# Altium PCB PCB2.PcbDoc
Units mil, origin at the board's own origin, x right, y up, seen from the top; angles counter-clockwise.
Board outline 2175 x 1405 mil, 2 copper layers (Top Layer, Bottom Layer); 9 components, 12 nets, 78 pads, 11 vias.
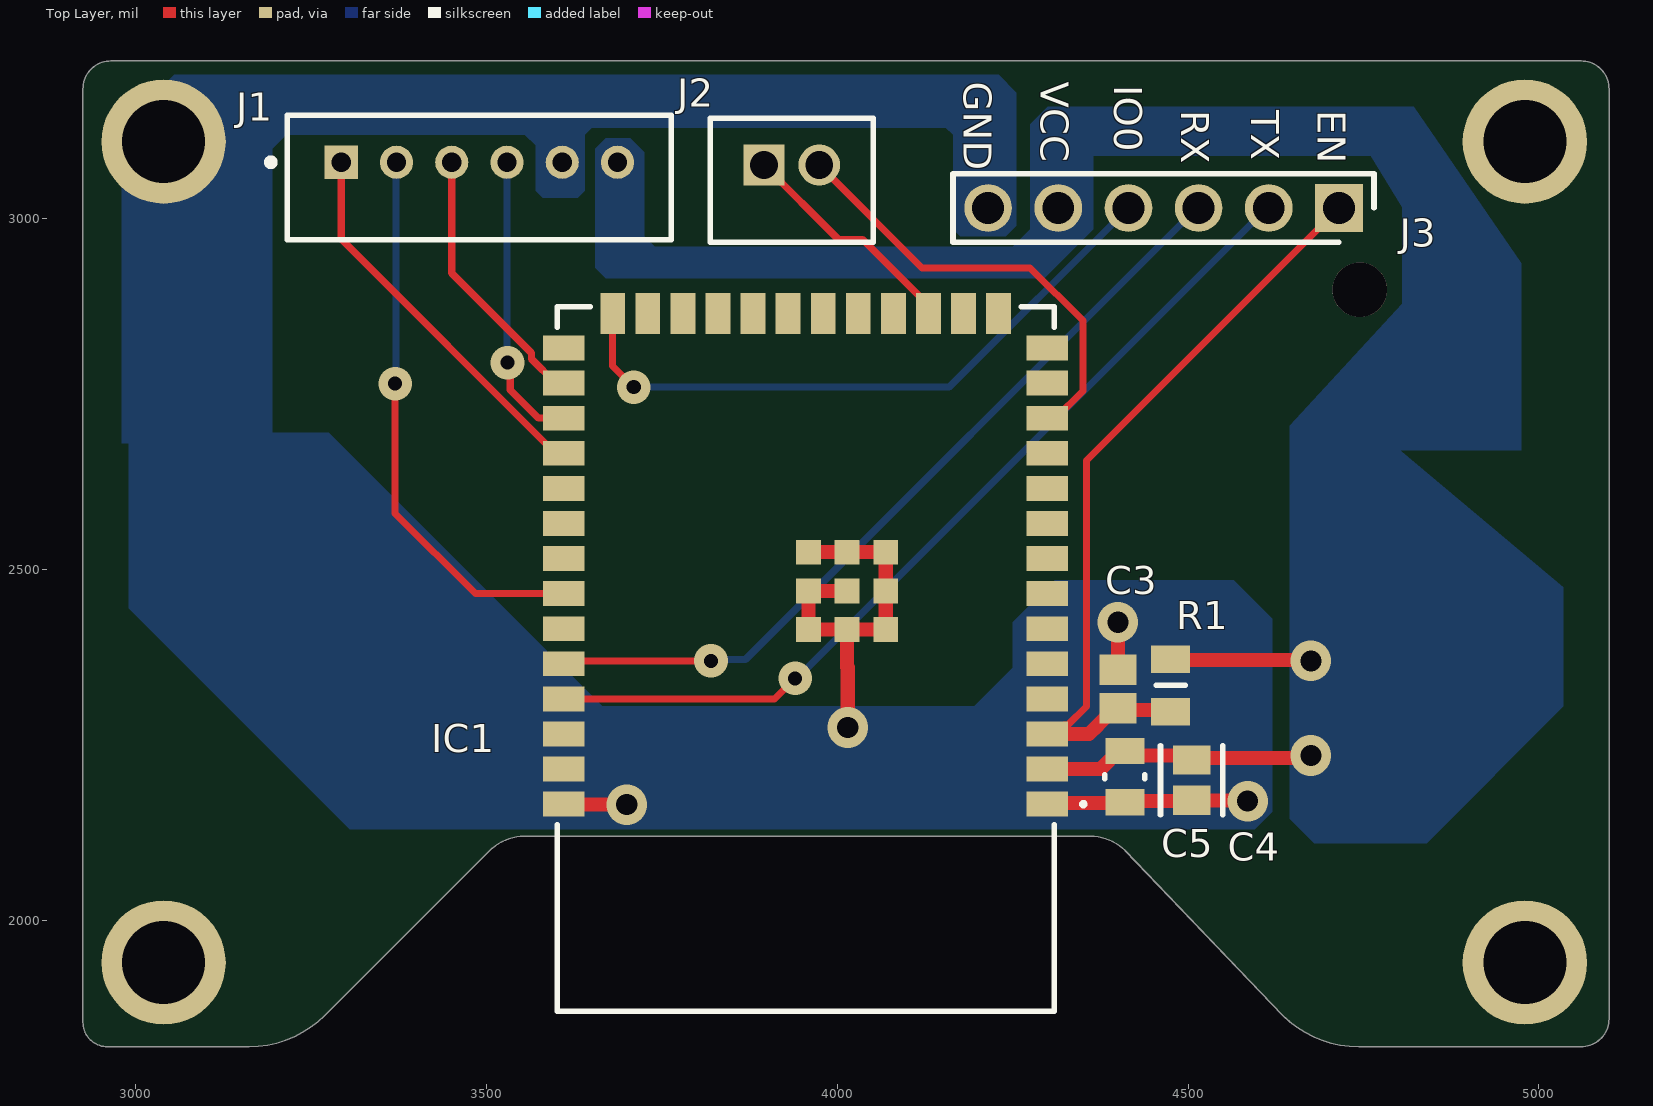
[diagram p0: Top Layer view]
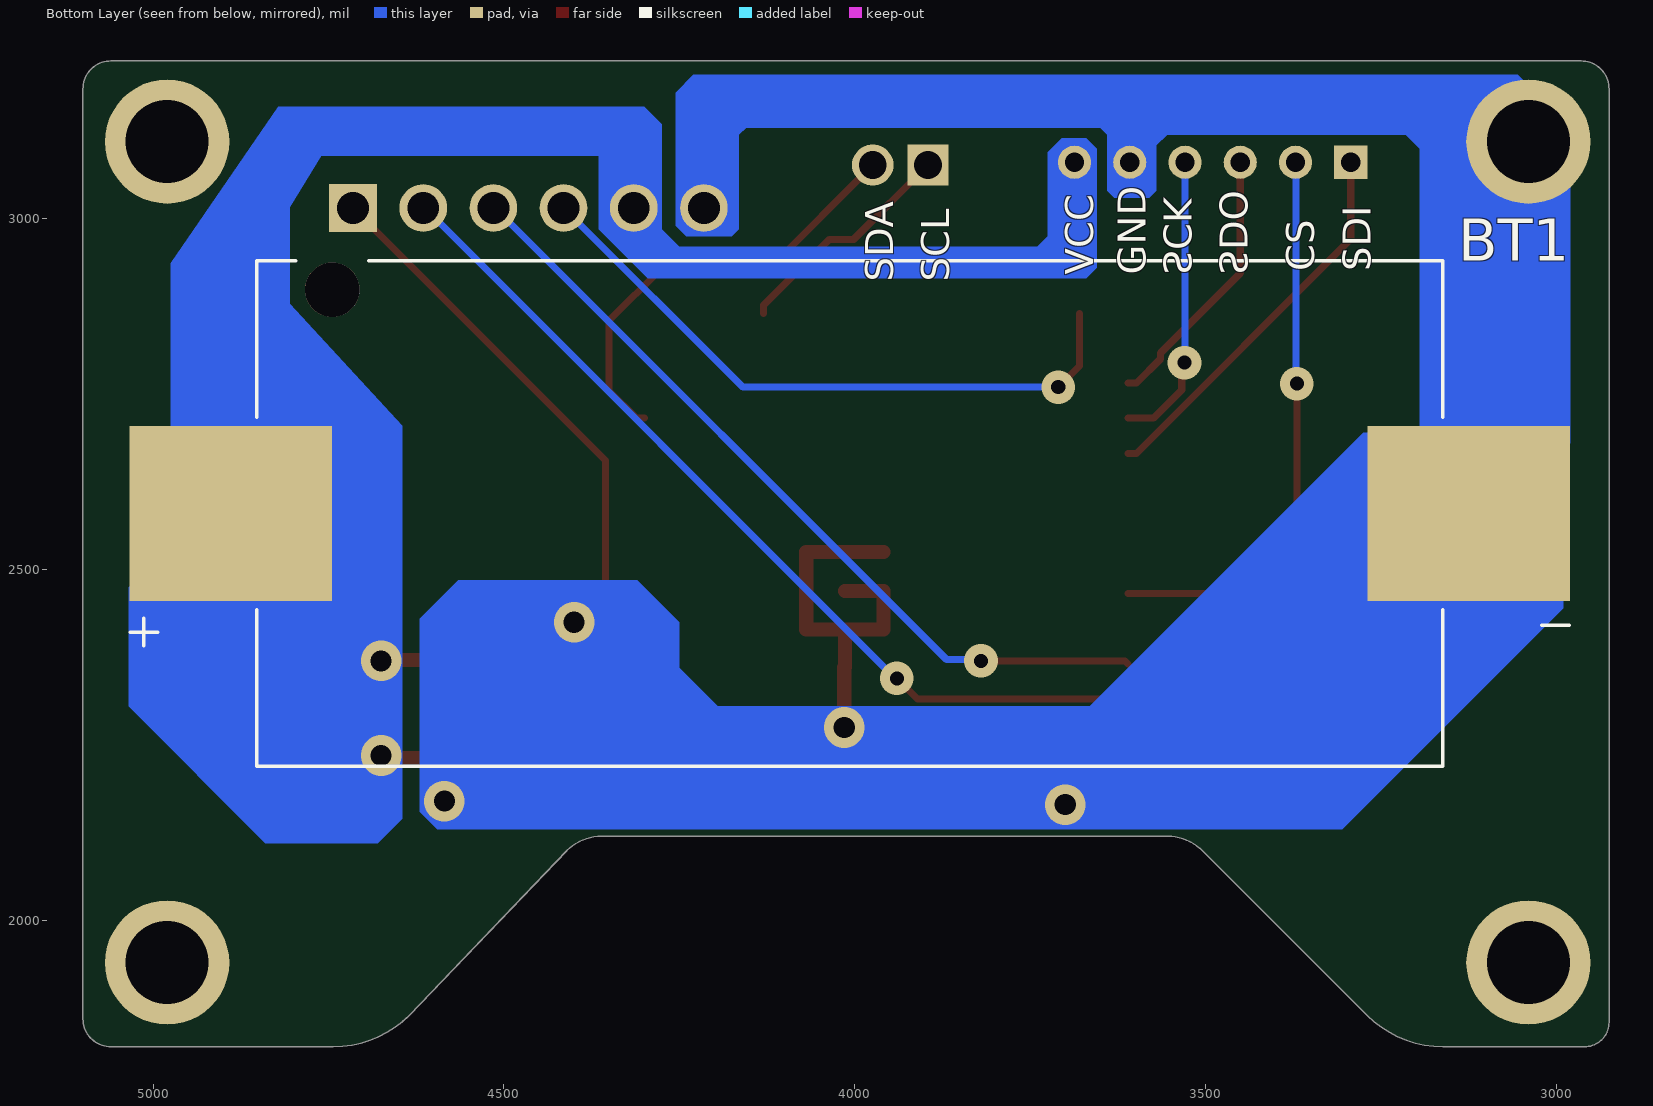
[diagram p1: Bottom Layer view, seen from below]
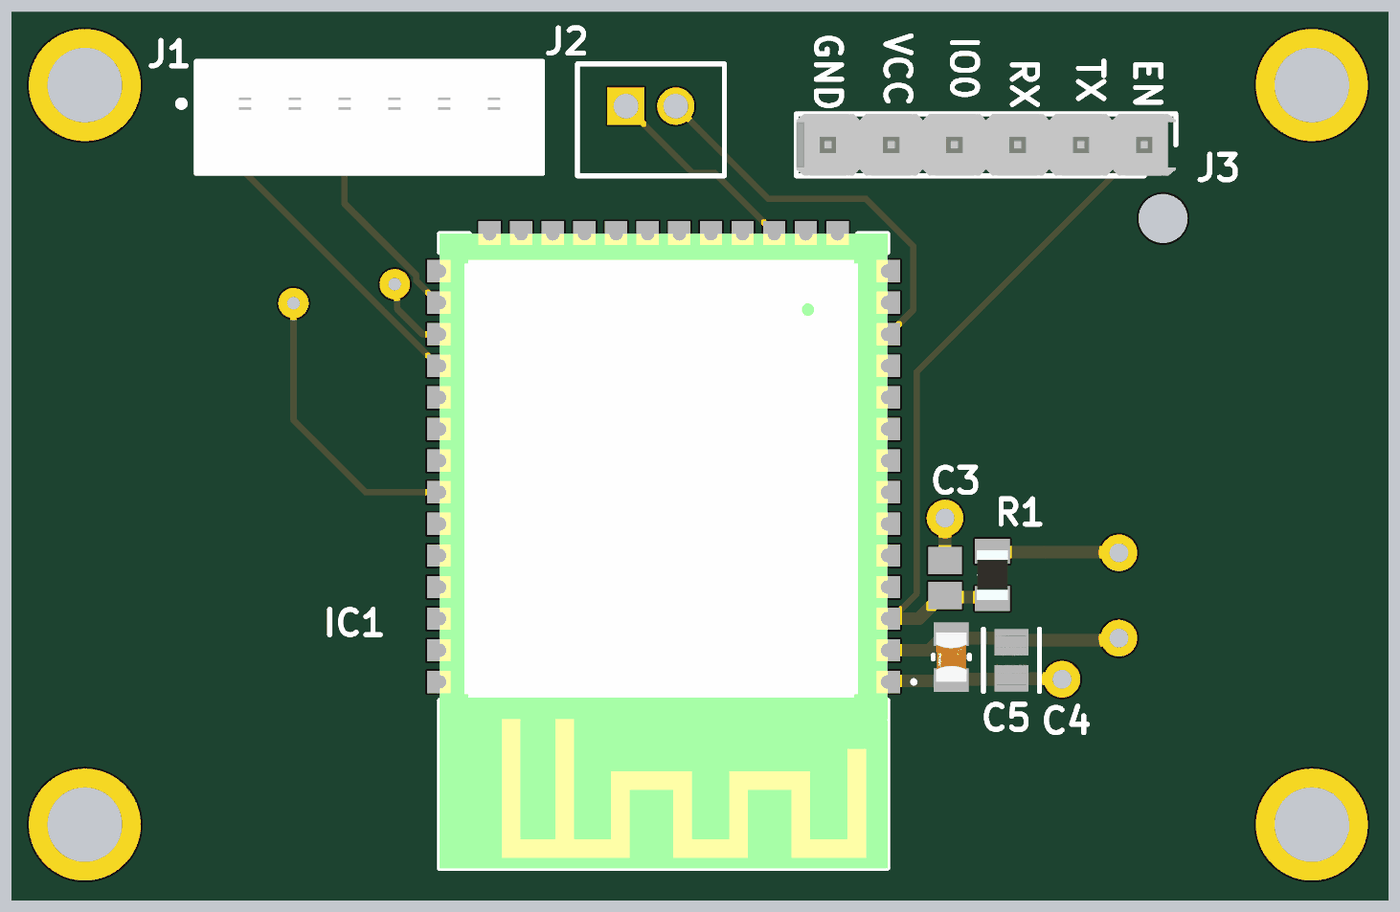
[diagram p2: 3D render of the assembled board from above, using the file's embedded part models]

## Layer stack, top to bottom
Top Solder: solder mask 0.4, Solder Resist, Dk 3.5
Top Layer: signal copper 1.4
Dielectric 1: dielectric 12.6, FR-4, Dk 4.8
Bottom Layer: signal copper 1.4
Bottom Solder: solder mask 0.4, Solder Resist, Dk 3.5

## Board outline
3269.75,1864.75 3504.39,2099.39 cw(c3554.14,2049.65) 3554.14,2120 4360.86,2120 cw(c4360.86,2049.67) 4410.61,2099.39 4635,1864.75 ccw(c4743.03,1972.78) 4743.03,1820 5060,1820 ccw(c5060,1860) 5100,1860 5100,3185 ccw(c5060,3185) 5060,3225 2965,3225 ccw(c2965,3185) 2925,3185 2925,1855 ccw(c2960,1855) 2960,1820 3161.72,1820 ccw(c3161.72,1972.78)

## Design rules (kind name [scope] priority, off if disabled: settings)
BoardOutlineClearance [All] p1: gap=7.87 ignorepadtopadclearanceinfootprint=FALSE
Clearance [All] p1: gap=5 ignorepadtopadclearanceinfootprint=FALSE except(9.84: Arc-Hole Track-Hole SMDPad-Hole THPad-Hole Via-Hole Fill-Hole Poly-Hole Region-Hole Text-Hole)
ComponentClearance [All] p1: gap=5 collisioncheckmode=3 verticalgap=5 showdistances=TRUE
DiffPairsRouting [All] p1: maxlimit=10 minlimit=5 mostfreqgap=5 toplayer_minwidth=5 toplayer_maxwidth=1000 toplayer_prefwidth=5 bottomlayer_minwidth=5 bottomlayer_maxwidth=1000 bottomlayer_prefwidth=5 maxuncoupledlength=500
Height [All] p1: minheight=0 maxheight=71497.94 prefheight=500
HoleSize [All] p1: absolutevalues=TRUE maxlimit=248.03 minlimit=11.81 maxpercent=80.000 minpercent=20.000
HoleToHoleClearance [All] p1: gap=9.84 allowstackedmicrovias=FALSE
MinimumAnnularRing [All] p1: minimumring=3
MinimumSolderMaskSliver [All] p1: minsoldermaskwidth=0
PlaneClearance [All] p1: clearance=5
PlaneConnect PlaneConnectPowerPads [InPadClass('PowerPads')] p1: planeconnectstyle=Direct reliefexpansion=20 reliefentries=4 reliefconductorwidth=10 reliefairgap=10
PlaneConnect [All] p2: pad.planeconnectstyle=Relief pad.reliefexpansion=11.81 pad.reliefentries=4 pad.reliefconductorwidth=5 pad.reliefairgap=5 via.planeconnectstyle=Direct via.reliefexpansion=11.81 via.reliefentries=4 via.reliefconductorwidth=5 via.reliefairgap=5
PolygonConnect PolygonConnectPowerPads [All vs (InPadClass('PowerPads'))] p1: connectstyle=Direct reliefconductorwidth=10 reliefentries=4 polygonreliefangle="90 Angle" airgapwidth=10
PolygonConnect [All] p2: thpad.connectstyle=Relief thpad.reliefconductorwidth=5 thpad.reliefentries=4 thpad.polygonreliefangle="90 Angle" thpad.airgapwidth=5 smdpad.connectstyle=Relief smdpad.reliefconductorwidth=5 smdpad.reliefentries=4 smdpad.polygonreliefangle="90 Angle" smdpad.airgapwidth=5 via.connectstyle=Direct via.reliefconductorwidth=5 via.reliefentries=4 via.polygonreliefangle="90 Angle" via.airgapwidth=5
RoutingVias [All] p1: holewidth=11.81 width=23.62 viastyle="Through Hole" minholewidth=11.81 minwidth=23.62 maxholewidth=23.62 maxwidth=259.84
SilkToSilkClearance [All] p1: silktosilkclearance=0
SilkToSolderMaskClearance [IsPad] p1: minsilkscreentomaskgap=5 clearancetoexposedcopper=TRUE
SolderMaskExpansion [All] p1: expansion=2.95 istentingtop=FALSE
Width [All] p1: maxlimit=1000 minlimit=5 preferedwidth=5 minimp=50.000000 maximp=50.000000 favimp=50.000000
20 further rules are at their usual default settings.

## Components (designator, comment, footprint, x,y, rotation, side; value= is the part's Value field where it differs from the comment)
BT1 "1128" BAT_1128 4007.09,2580 r180 bottom
C3 "1uF" CAPC2013X140X50LL20T25 4400,2330 r270 top
C4 "22uF" FP-CL21-IPC_C 4505,2200 r270 top
C5 "CC0805KRX7R7BB104" FP-CC0805-0_85-MFG 4410,2205 r270 top value="100 nF"
IC1 "ESP32-S3-WROOM-1" ESP32S3WROOM1 3955,2372.87 r180 top
J1 "B6B-PH-K-K(LF)(SN)" FP-B6B-PH-K-K_LF_SN-MFG 3490,3058.94 r180 top
J2 "B2B-PH-K-S(LF)(SN)" JST-B2B-PH-K-S_V 3935,3055 r0 top
J3 "22-28-4060" HDRV6W66P0X254_1X6_1524X249X838P 4715,3015.43 r180 top
R1 "10K" RESC2012X60N 4475,2335 r270 top

## Footprints (in the part's own frame and the unit in brackets; to place one, negate y for a bottom-side part, rotate by r counter-clockwise, add the part's x,y. Pads: shape width x height; smd on the part's side, far side on the other; paste and mask are expansions set on the pad)
BAT_1128 [mm]
  rect 7.34x6.35 smd: N(22.405,0) P(-22.405,0)
  round 1.98 hole 1.98 unplated: ""(-18.735,8.1)
  silkscreen extent -26.05,-9.15 26.05,9.15
CAPC2013X140X50LL20T25 [mm] "Chip Capacitor, 2-Leads, Body 2.00x1.25mm, IPC High Density"
  rect 1.1x1.35 smd: 1(-0.7,0) 2(0.7,0)
  body extent -1.1,-0.72 1.1,0.72, height 1.4
ESP32S3WROOM1 [mm]
  rect 1.5x0.9 smd: 1(-8.75,5.26) 2(-8.75,3.99) 3(-8.75,2.72) 4(-8.75,1.45) 5(-8.75,0.18) 6(-8.75,-1.09) 7(-8.75,-2.36) 8(-8.75,-3.63) 9(-8.75,-4.9) 10(-8.75,-6.17) 11(-8.75,-7.44) 12(-8.75,-8.71) 13(-8.75,-9.98) 14(-8.75,-11.25) 27(8.75,-11.25) 28(8.75,-9.98) 29(8.75,-8.71) 30(8.75,-7.44) 31(8.75,-6.17) 32(8.75,-4.9) 33(8.75,-3.63) 34(8.75,-2.36) 35(8.75,-1.09) 36(8.75,0.18) 37(8.75,1.45) 38(8.75,2.72) 39(8.75,3.99) 40(8.75,5.26)
  rect 0.9x1.5 smd: 15(-6.985,-12.5) 16(-5.715,-12.5) 17(-4.445,-12.5) 18(-3.175,-12.5) 19(-1.905,-12.5) 20(-0.635,-12.5) 21(0.635,-12.5) 22(1.905,-12.5) 23(3.175,-12.5) 24(4.445,-12.5) 25(5.715,-12.5) 26(6.985,-12.5)
  rect 0.9x0.9 smd: 41(-1.5,-2.46) 42(-1.5,-1.06) 43(-2.9,-1.06) 44(-2.9,-2.46) 45(-2.9,-3.86) 46(-1.5,-3.86) 47(-0.1,-3.86) 48(-0.1,-2.46) 49(-0.1,-1.06)
  silkscreen extent -10.1,-12.75 9,12.75, body extent -9,-12.75 9,12.75, height 3.1
FP-B6B-PH-K-K_LF_SN-MFG [mm]
  rect 1.2x1.2 hole 0.7 paste-1000 mask+0: 1(5,-0.55)
  round 1.2 hole 0.7 paste-1000 mask+0: 2(3,-0.55) 3(1,-0.55) 4(-1,-0.55) 5(-3,-0.55) 6(-5,-0.55)
  silkscreen extent -6.95,-2.25 7.67,2.25, body extent -7.05,-2.35 7.05,2.35, height 0.25
FP-CC0805-0_85-MFG [mm]
  rect 0.95x1.4 smd paste+0 mask+0: 1(-0.925,0) 2(0.925,0)
  silkscreen extent -0.08,-0.72 0.08,0.72, body extent -1.6,-1.05 1.6,1.05, height 0.25
FP-CL21-IPC_C [mil]
  rect 41.52x53.39 smd paste+0 mask+0: 1(-28.57,0) 2(28.57,0)
  silkscreen extent -49,-44 49,44, body extent -53,-32 53,32, height 10
HDRV6W66P0X254_1X6_1524X249X838P [mm]
  rect 1.725x1.725 hole 1.15: 1(0,0)
  round 1.725 hole 1.15: 2(2.54,0) 3(5.08,0) 4(7.62,0) 5(10.16,0) 6(12.7,0)
  silkscreen extent -1.27,-1.24 13.97,1.24, body extent -1.27,-1.24 13.97,1.24, height 8.38
JST-B2B-PH-K-S_V [mm] "Connector, 2-Leads, Body 5.9x4.5mm, Pitch 2mm"
  rect 1.5x1.5 hole 1: 1(-1,0.55)
  round 1.5 hole 1: 2(1,0.55)
  silkscreen extent -2.95,-2.25 2.95,2.25, body extent -2.95,-2.25 2.95,2.25, height 6
RESC2012X60N [mm]
  rect 1x1.4 smd: 1(-0.95,0) 2(0.95,0)
  silkscreen extent 0,-0.53 0,0.53, body extent -1,-0.63 1,0.63, height 0.6

## Part data
BT1: "SMT Holder for CR123A Battery w/ coil spring", Package=None, Availability="In Stock", Check_prices=https://www.snapeda.com/parts/1128/Keystone+Electronics/view-part/?ref=eda, MF="Keystone Electronics", MP=1128, Price=None, Purchase-URL=https://pricing.snapeda.com/search/part/1128/?ref=eda, SnapEDA_Link=https://www.snapeda.com/parts/1128/Keystone+Electronics/view-part/?ref=snap
C3: library part CMP-2007-04674-1, Manufacturer="AVX Interconnect / Elco", Part Number=0805ZC105KAZ2A
C4: library part CMP-13271-002990-1, "CL21 Series 0805 22uF 16V ±20% Tolerance X5R Multilayer Ceramic Chip Capacitor", Case Code (Imperial)=0805, Case Code (Metric)=2012, Max Operating Temperature=85°C, Min Operating Temperature=-55°C, Tolerance=20%, Voltage Rating=16V, Capacitance=22uF, Case/Package=0805, Length=0.079inch, Mount="Surface Mount", Packaging="Tape and Reel", Thickness=0.037inch, Width=0.049inch
C5: library part CMP-1036-04402-6, "CAP CER 0.1UF 16V X7R 0805", Capacitance="100 nF", Manufacturer=Yageo, Package=CC0805-0.85, Temperature="-30°C to +85°C", Temperature Characteristic=X7R, Temperature Range High=+85°C, Temperature Range Low=-30°C, Tolerance=0.1, Voltage Rating="16 V", Automotive=No, Category=Cap, ComponentLink2Description=Datasheet, ComponentLink2URL=http://www.yageo.com/documents/recent/UPY-GPHC_Y5V_6.3V-to-50V_8.pdf, Device Class L1="Passive Components", Device Class L2=Capacitors, Device Class L3="Ceramic Capacitors", Digikey Description="CAP CER 0.1UF 16V X7R 0805", Footprint Url=http://www.yageo.com/exep/pages/download/literatures/UPY-C_GEN_24.pdf, Height=0.95mm, Ipc Land Pattern Name=CAPC200125X85, Lead Free=Yes, Manufacturer Part Number=CC0805KRX7R7BB104, Material=Ceramic, Mouser Description="Multilayer Ceramic Capacitors MLCC - SMD/SMT 100nF 16V X7R 10%", Octopart=https://octopart.com/cc0805krx7r7bb104-yageo-39467769, RoHS=TRUE
IC1: "Integrated Circuit", Manufacturer_Name="Espressif Systems", Datasheet Link=https://www.mouser.com/catalog/specsheets/Espressif_ESP32_S3_WROOM_1_1U_Preliminary.pdf, Height=3.25mm, Manufacturer_Part_Number=ESP32-S3-WROOM-1
J1: library part CMP-17439-000495-1, "PH Series 6 Position 2 mm Pitch Through Hole Top Entry Shrouded Header", Lead Free="Lead Free"
J2: library part CMP-2000-05162-1, "Male Header, Pitch 2 mm, 1 x 2 Position, Height 6 mm, Tail Length 3.4 mm, -25 to 85 degC, RoHS, Bulk", Manufacturer=JST, Datasheet URL=http://datasheet.octopart.com/B2B-PH-K-S%28LF%29%28SN%29-JST-datasheet-8324864.pdf, Datasheet Version=Nov-08, Manufacturer URL=http://www.jst.com/home2.html, No of Positions=2, Pitch=2mm, Style/Orientation=StraightHeader/Plug, Termination=Crimp, Type=ShroudedHeader
J3: "Connector", Manufacturer_Name=Molex, Mouser Part Number=538-22-28-4060, Datasheet Link=https://www.molex.com/pdm_docs/sd/022284060_sd.pdf, Height=8.38mm, Manufacturer_Part_Number=22-28-4060, Mouser Price/Stock=https://www.mouser.co.uk/ProductDetail/Molex/22-28-4060?qs=d9fIA1aNikSACgwI0d%252BTOw%3D%3D
R1: library part CMP0805AFX-1002ELF, "Resistor", Manufacturer_Name=Bourns, Mouser Part Number=652-CMP0805AFX-1002L, Arrow Part Number=CMP0805AFX-1002ELF, Arrow Price/Stock=https://www.arrow.com/en/products/cmp0805afx-1002elf/bourns?region=nac, Datasheet Link=https://ms.componentsearchengine.com/Datasheets/2/CMP0805AFX-1002ELF.pdf, Height=0.6mm, Manufacturer_Part_Number=CMP0805AFX-1002ELF, Mouser Price/Stock=https://www.mouser.co.uk/ProductDetail/Bourns/CMP0805AFX-1002ELF?qs=TiOZkKH1s2RdWJm6UffAxg%3D%3D

## Free pads (board coordinates)
  round 177.16 hole 118.11: 33(3040,1940) 33(3040,3110) 33(4980,1940) 33(4980,3110)

## Via types
v1: diameter 58, hole 30, Top Layer to Bottom Layer, 6 vias
v2: diameter 48, hole 20, Top Layer to Bottom Layer, 5 vias

## Nets (pads, with @x,y where several pads share a name; then routed paths per layer and width w, separated by ;. In a path a pad name is that pad's centre, name@x,y a point inside that pad or via, vN(x,y) a via of type N, cw(c..) or ccw(c..) an arc to the next point about the centre after c; other vN are vias at no path point)
CS: IC1.34 J1.2 | length 789.2
  Top Layer w10: v2(3370,2765) 3370,2580 3484.21,2465.79 IC1.34
  Bottom Layer w10: v2(3370,2765) 3370.94,2765.94 3370.94,3079.65 J1.2
EN: C3.2 IC1.3 J3.1 R1.2 | length 1115.2
  Top Layer w10: IC1.3 4315.79,2265.79 4315.79,2270.28 4324.02,2278.5 4328.5,2278.5 4355,2305 4355,2655.43 J3.1
  Top Layer w20: IC1.3@4311.3,2265.79 4359.02,2265.79 4370.73,2277.5 4370.73,2278.09 4395.08,2302.44 C3.2 4402.42,2300.02 4472.58,2300.02 R1.2
GND: BT1.N C3.1 C4.2 C5.2 IC1.1 IC1.40 IC1.41 IC1.42 IC1.43 IC1.44 IC1.45 IC1.46 IC1.47 IC1.48 IC1.49 J1.5 J3.6 pad.33@3040,3110 | length 1026.6
  Top Layer w20: IC1.40 3610.91,2165.39 3699.61,2165.39 v1(3700,2165) ; IC1.47 IC1.46 IC1.45 IC1.44 IC1.43 IC1.42 ; IC1.41 IC1.48 IC1.49 IC1.42 ; v1(4015,2275) 4015,2360.43 4014.06,2361.38 IC1.42 ; IC1.1 4300.89,2167.19 4408.6,2167.19 C5.2 4411.42,2170 4503.58,2170 C4.2 4505.71,2170.71 4584.29,2170.71 v1(4585,2170) ; C3.1 v1(4400,2425)
IO0: IC1.26 J3.4 | length 928.2
  Top Layer w10: IC1.26 3680,2790 v2(3710,2760)
  Bottom Layer w10: v2(3710,2760) 4159.57,2760 J3.4
RX: IC1.36 J3.3 | length 1171.1
  Top Layer w10: IC1.36 3614.72,2370 v2(3820,2370)
  Bottom Layer w10: v2(3820,2370) 3822.27,2372.27 3869.55,2372.27 J3.3@4512.55,3015.26
SCK: IC1.29 J1.4 | length 419.7
  Top Layer w10: v2(3530,2795) 3534,2791 3534,2756 3574.21,2715.79 IC1.29
  Bottom Layer w10: J1.4 3529.69,3080.28 3529.69,2795.31 v2(3530,2795)
SCL: IC1.17 J2.1 | length 329
  Top Layer w10: J2.1 4001.46,2970.83 4035.98,2970.83 4130,2876.81 IC1.17
SDA: IC1.12 J2.2 | length 634.5
  Top Layer w10: J2.2 4121.02,2930 4275,2930 4350,2855 4350,2754.49 4311.3,2715.79 IC1.12
SDI: IC1.30 J1.1 | length 553.2
  Top Layer w10: J1.1 3293.15,2971.34 3598.7,2665.79 IC1.30
SDO: IC1.28 J1.3 | length 387.9
  Top Layer w10: J1.3 3450.63,2922.45 3564,2809.08 3564,2800.49 3598.7,2765.79 IC1.28
TX: IC1.37 J3.2 | length 1294.3
  Top Layer w10: IC1.37 3910.79,2315.79 v2(3940,2345)
  Bottom Layer w10: v2(3940,2345) 3942.28,2345 4612.72,3015.43 J3.2
VCC: BT1.P C4.1 C5.1 IC1.2 J1.6 J3.5 R1.1 | length 604.2
  Top Layer w20: IC1.2 4375.51,2215.79 4401.14,2241.42 C5.1 4416.42,2235 4498.57,2235 C4.1 4508.21,2231.79 4671.79,2231.79 v1(4675,2235) ; C5.1@4418.86,2241.42 C5.1@4425.28,2235 ; R1.1 4476.2,2371.2 4673.8,2371.2 v1(4675,2370)
pads on no net: BT1. IC1.4 IC1.5 IC1.6 IC1.7 IC1.8 IC1.9 IC1.10 IC1.11 IC1.13 IC1.14 IC1.15 IC1.16 IC1.18 IC1.19 IC1.20 IC1.21 IC1.22 IC1.23 IC1.24 IC1.25 IC1.27 IC1.31 IC1.32 IC1.33 IC1.35 IC1.38 IC1.39

## Other copper
Bottom Layer:
  region net VCC: 4645,2705 4805,2878.68 4805,3016.63 4760,3090 4365,3090 4365,3000 4335,2970 4330,2975 4275,2975 4275,3135 4300,3160 4821.33,3160 4975,2936.94 4975,2670 4645,2670
  region net VCC: 3725,3095 3725,2975 3740,2960 4250,2960 4290,3000 4365,3000 4365,2985 4295,2915 3670,2915 3655,2930 3655,3100 3670,3115 3705,3115
  region net VCC: 5035,2475 5035,2305 4840,2110 4680,2110 4645,2145 4645,2705 4760,2705
  region net GND: 2980,2680 2980,3130 3055,3205 4230,3205 4255,3180 4255,2990 4240,2975 4175,2975 4165,2985 4165,3120 4155,3130 3650,3130 3640,3120 3640,3040 3630,3030 3580,3030 3570,3040 3570,3105 3555,3120 3215,3120 3195,3100 3195,2680
  region net GND: 2990,2690 2990,2445 3305,2130 4595,2130 4620,2155 4620,2430 4565,2485 4310,2485 4250,2425 4250,2360 4195,2305 3665,2305 3275,2695 2995,2695

## Silkscreen, mask and mechanical layers (free items; w line width, h text height)
Top Overlay:
  text "GND" at 4180,3195 h40 r270
  text "VCC" at 4290,3195 h40 r270
  text "IO0" at 4395,3190 h40 r270
  text "RX" at 4490,3155 h40 r270
  text "TX" at 4590,3155 h40 r270
  text "EN" at 4685,3155 h40 r270
Bottom Overlay:
  text "SDI" at 3265,2925 h40 r270
  text "CS" at 3345,2925 h40 r270
  text "SDO" at 3480,2920 h40 r90
  text "SCK" at 3560,2920 h40 r90
  text "GND" at 3585,2920 h40 r270
  text "VCC" at 3660,2920 h40 r270
  text "SCL" at 3865,2910 h40 r270
  text "SDA" at 3945,2910 h40 r270